# Altium PCB PCB1.PcbDoc
Units mil, origin at the board's own origin, x right, y up, seen from the top; angles counter-clockwise.
Board outline 2515 x 2455 mil, 2 copper layers (Top Layer, Bottom Layer); 61 components, 46 nets, 222 pads, 26 vias.
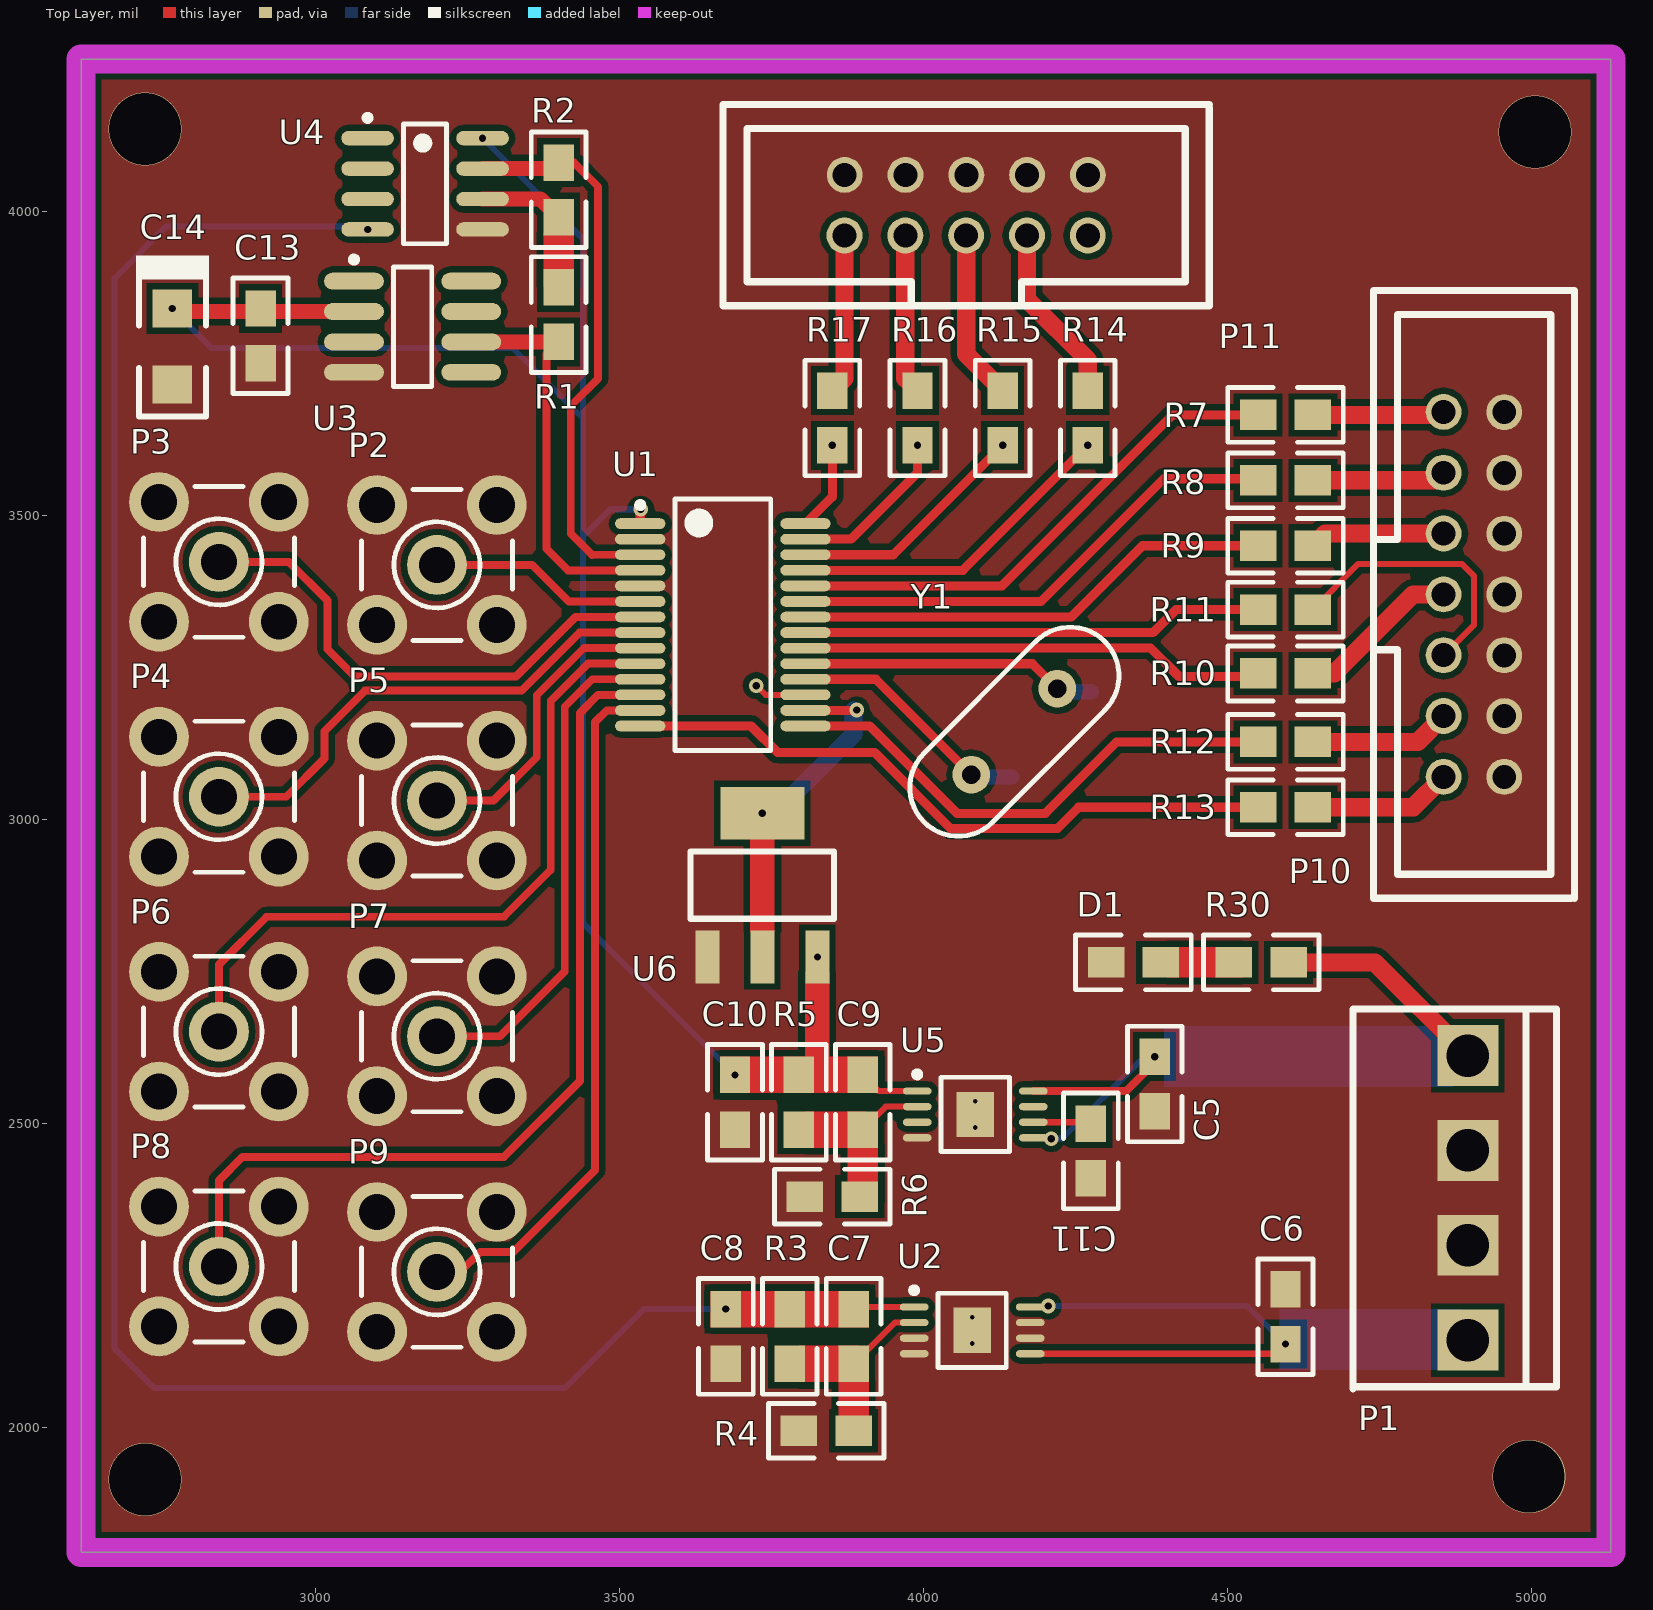
[diagram p0: Top Layer view]
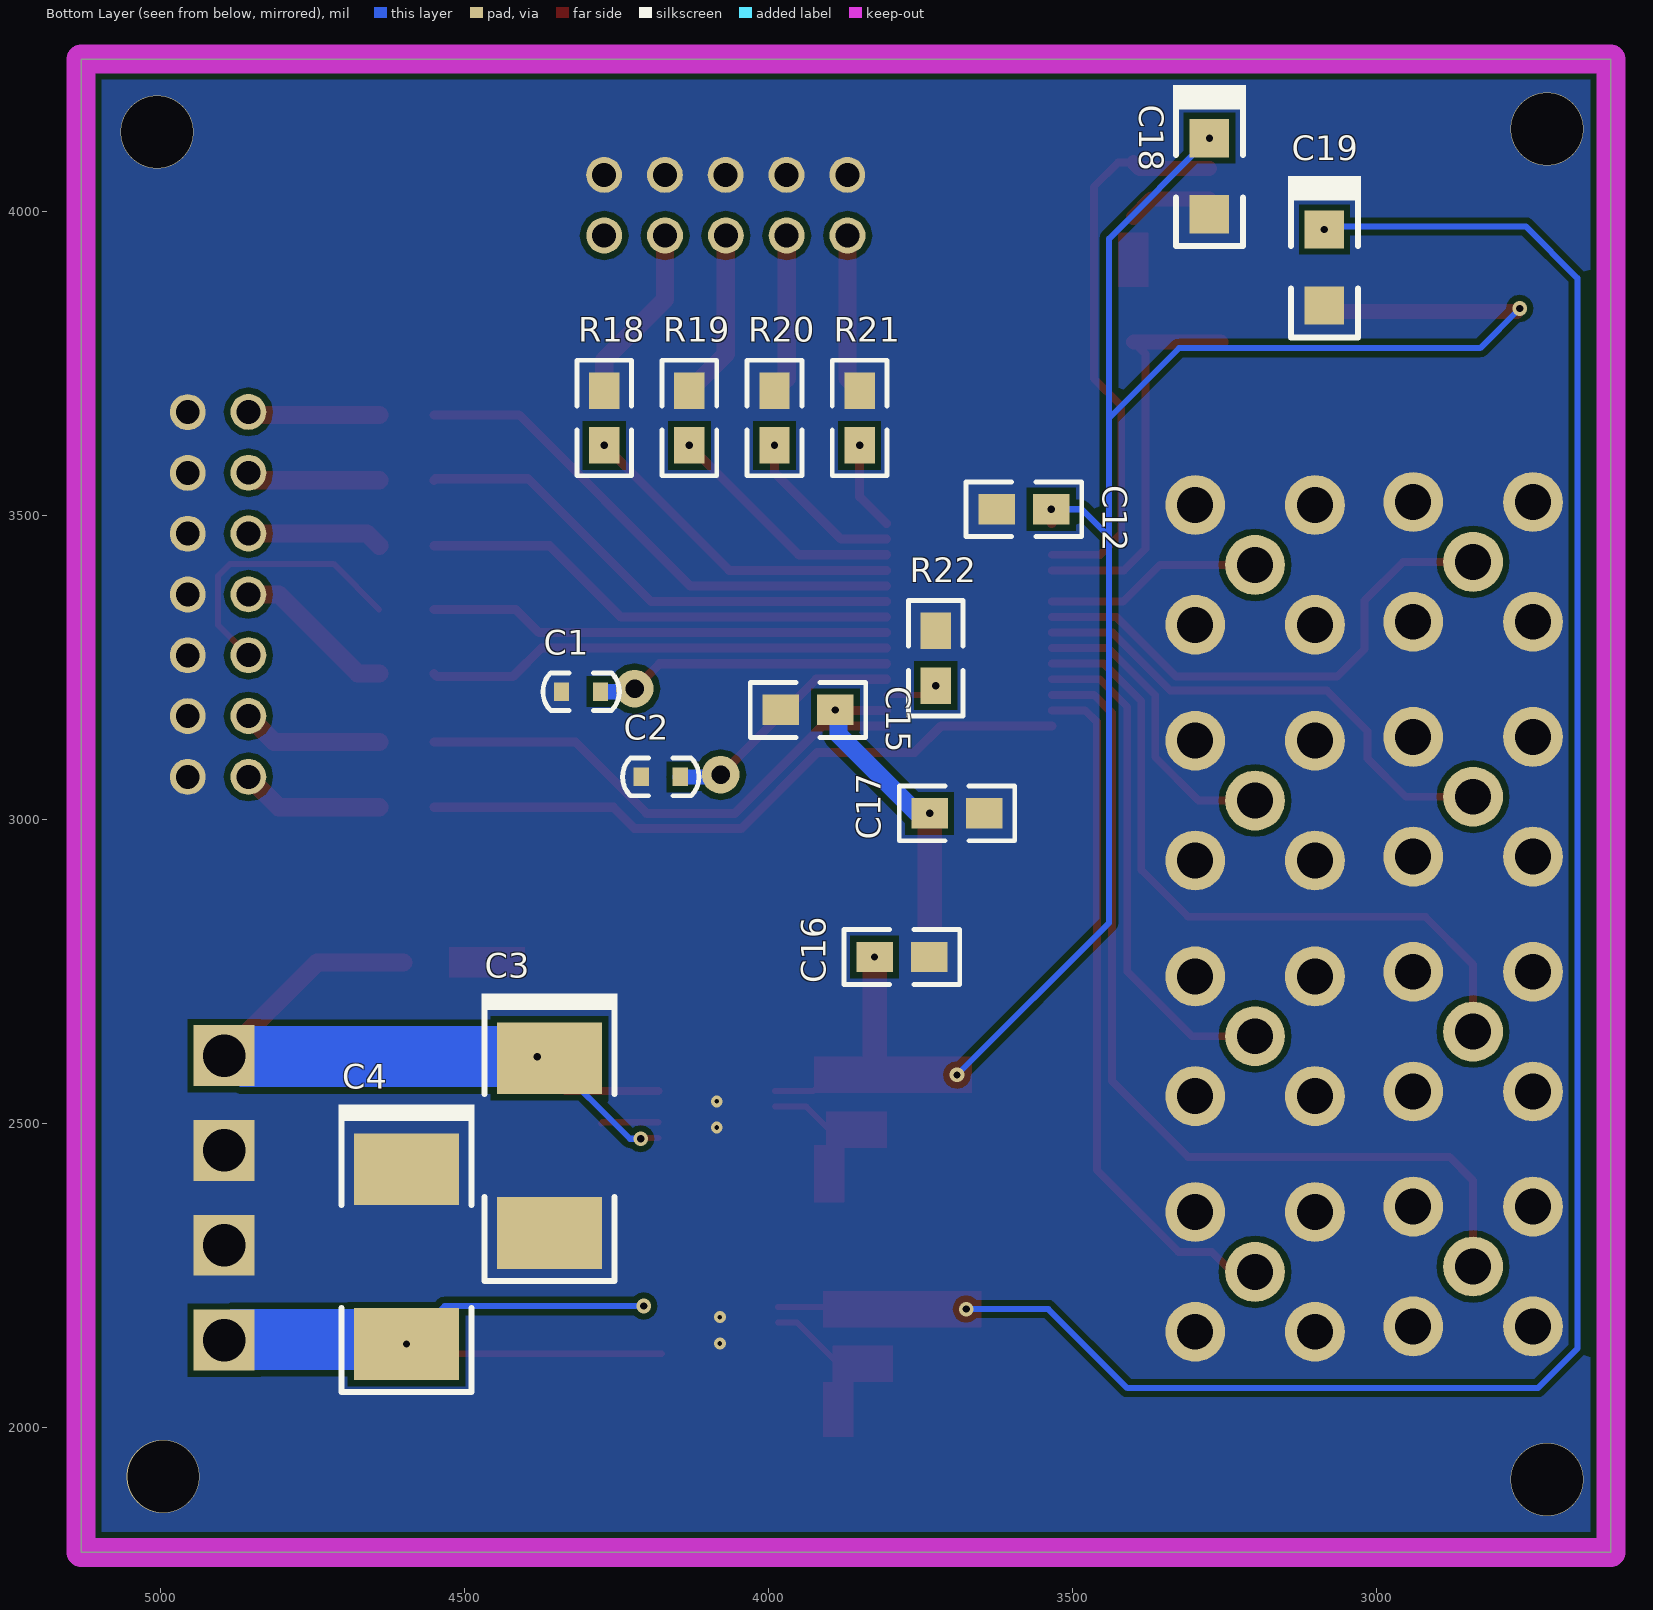
[diagram p1: Bottom Layer view, seen from below]

## Layer stack, top to bottom
Top Solder: solder mask 0.4, Solder Resist, Dk 3.5
Top Layer: signal copper 1.4
Dielectric 1: dielectric 12.6, FR-4, Dk 4.8
Bottom Layer: signal copper 1.4
Bottom Solder: solder mask 0.4, Solder Resist, Dk 3.5

## Board outline
2615,1795 5130,1795 5130,4250 2615,4250

## Design rules (kind name [scope] priority, off if disabled: settings)
Clearance [All] p1: gap=10
PlaneConnect [All] p1: planeconnectstyle=Direct reliefexpansion=20 reliefentries=4 reliefconductorwidth=10 reliefairgap=10
PolygonConnect [All] p1: connectstyle=Direct reliefconductorwidth=10 reliefentries=4 polygonreliefangle="90 Angle" airgapwidth=10
RoutingVias [All] p1: holewidth=28 width=50 viastyle="Through Hole" minholewidth=28 minwidth=50 maxholewidth=28 maxwidth=50
SolderMaskExpansion [All] p1: expansion=4
Width [All] p1: maxlimit=100 minlimit=10 preferedwidth=10
29 further rules are at their usual default settings.

## Components (designator, comment, footprint, x,y, rotation, side; value= is the part's Value field where it differs from the comment)
C1 "18P" 0603C 4340,3210 r180 bottom
C2 "18P" 0603C 4209,3070 r180 bottom
C3 "Cap" 7343C-TYPE_D 4360,2607.4 r90 bottom
C4 "Cap" 7343C-TYPE_D 4595,2425 r90 bottom
C5 "0.1uf" 0805 4380,2610 r270 top
C6 "0.1uf" 0805 4595,2137.6 r90 top
C7 "10nf" 0805 3885,2105 r90 top
C8 "10uf" 0805 3675,2105 r90 top
C9 "10nf" 0805 3900,2490 r90 top
C10 "10uf" 0805 3690,2490 r90 top
C11 "10nf" 0805 4275,2410 r90 top
C12 "0.1uf" 0805 3625,3510 r180 bottom
C13 "0.1uf" 0805 2910,3750 r90 top
C14 "Cap" 3216C-TYPE_A 2765,3840 r90 top
C15 "0.1uf" 0805 3980,3180 r180 bottom
C16 "0.1uf" 0805 3735.55,2773.78 r0 bottom
C17 "0.1uf" 0805 3645,3010 r0 bottom
C18 "0.1uf" 3216C-TYPE_A 3275,4120 r90 bottom
C19 "0.1uf" 3216C-TYPE_A 3086.02,3970 r90 bottom
D1 "LED" 0805 4390,2765 r180 top
P1 "VH3.96-4A" VH3.96-4P 5040.67,2688.58 r270 top
P2 "SMB" SMB_V-RJ45 3200,3418.43 r90 top
P3 "SMB" SMB_V-RJ45 2841.57,3423.43 r90 top
P4 "SMB" SMB_V-RJ45 2841.57,3037.28 r90 top
P5 "SMB" SMB_V-RJ45 3200,3031.01 r90 top
P6 "SMB" SMB_V-RJ45 2841.57,2651.14 r90 top
P7 "SMB" SMB_V-RJ45 3200,2643.6 r90 top
P8 "SMB" SMB_V-RJ45 2841.57,2265 r90 top
P9 "SMB" SMB_V-RJ45 3200,2256.18 r90 top
P10 "DC3-20P" DC3-14P 4739.65,3869.61 r270 top
P11 "DC3-10P" DC3-10P 3670.39,3844.65 r0 top
R1 "100K" 0805 3400,3875 r270 top
R2 "100K" 0805 3400,4080 r270 top
R3 "0" 0805 3780,2105 r90 top
R4 "0" 0805 3795,1995 r0 top
R5 "0" 0805 3795,2490 r90 top
R6 "0" 0805 3805,2380 r0 top
R7 "100R" 0805 4640,3665 r180 top
R8 "100R" 0805 4640,3557.5 r180 top
R9 "100R" 0805 4640,3450 r180 top
R10 "100R" 0805 4640,3240 r180 top
R11 "100R" 0805 4640,3345 r180 top
R12 "100R" 0805 4640,3127.5 r180 top
R13 "100R" 0805 4640,3020 r180 top
R14 "100R" 0805 4270,3705 r270 top
R15 "100R" 0805 4130,3705 r270 top
R16 "100R" 0805 3990,3705 r270 top
R17 "100R" 0805 3850,3705 r270 top
R18 "100R" 0805 4270,3705 r270 bottom
R19 "100R" 0805 4130,3705 r270 bottom
R20 "100R" 0805 3990,3705 r270 bottom
R21 "100R" 0805 3850,3705 r270 bottom
R22 "0" 0805 3725,3220 r90 bottom
R30 "10K" 0805 4600,2765 r180 top
U1 "ADS1256IDBRG4" TI-DB28_N 3670,3320 r0 top
U2 "TPS7A3401DGNR" TI-DGN8-1760X1425TP_N 4080,2160 r0 top
U3 "REF43" TI-D8_M 3160,3810 r0 top
U4 "OPA2333AIDRG4" TI-D8_N 3180.51,4045 r0 top
U5 "TPS7A4901DGNR" TI-DGN8-1760X1425TP_N 4085,2515 r0 top
U6 "AMS1117-3.3V" SOT-223 3735,2891.89 r270 top
Y1 "XTAL" HC-49S 4220,3215 r225 top

## Footprints (in the part's own frame and the unit in brackets; to place one, negate y for a bottom-side part, rotate by r counter-clockwise, add the part's x,y. Pads: shape width x height; smd on the part's side, far side on the other; paste and mask are expansions set on the pad)
0603C [mil]
  rect 25x30 smd: 1(0,0) 2(64,0)
  silkscreen extent -31,-31 95,31
0805 [mil]
  rect 60x50 smd: 1(0,0) 2(90,0)
  silkscreen extent -50,-45 140,45
3216C-TYPE_A [mm]
  rect 1.6x1.65 smd: 1(0,0) 2(-3.175,0)
  silkscreen extent -4.51,-1.54 2.22,1.52
7343C-TYPE_D [mm]
  rect 3x4.4 smd: 1(0,0) 2(-7.3,0)
  silkscreen extent -9.31,-2.84 2.7,2.84
DC3-10P [mm]
  round 1.5 hole 1: 1(5.07,2.93) 2(5.08,5.461) 3(7.61,2.93) 4(7.618,5.461) 5(10.15,2.93) 6(10.157,5.461) 7(12.69,2.93) 8(12.695,5.461) 9(15.23,2.93) 10(15.233,5.461)
  silkscreen extent 0,0 20.3,8.4
DC3-14P [mm]
  round 1.5 hole 1: 1(5.07,2.93) 2(5.08,5.461) 3(7.61,2.93) 4(7.618,5.461) 5(10.15,2.93) 6(10.157,5.461) 7(12.69,2.93) 8(12.695,5.461) 9(15.23,2.93) 10(15.233,5.461) 11(17.77,2.93) 12(17.772,5.461) 13(20.31,2.93) 14(20.31,5.461)
  silkscreen extent 0,0 25.38,8.4
HC-49S [mil]
  round 62 hole 30: 1(0,0) 2(200,0)
  silkscreen extent -110,-80 310,80
SMB_V-RJ45 [mm] "Connector; SMB Straight"
  round 2.5 hole 1.5: 1(0,0) 2(-2.5,-2.5) 2(-2.5,2.5) 2(2.5,-2.5) 2(2.5,2.5)
  silkscreen extent -3.15,-3.15 3.15,3.15
SOT-223 [mm]
  rect 2.2x1 smd: 1(3,-2.3) 2(3,0) 3(3,2.3)
  rect 2.2x3.5 smd: 2(-3,0)
  silkscreen extent -1.4,-3 1.4,3, body extent -3.49,-3.24 3.49,3.24, height 1.64
TI-D8_M [mm] "SOIC, 8-Leads, Body 4.9x3.9mm, Pitch 1.27mm, IPC Low Density"
  oval 2.5x0.7 smd: 1(-2.45,1.905) 2(-2.45,0.635) 3(-2.45,-0.635) 4(-2.45,-1.905) 5(2.45,-1.905) 6(2.45,-0.635) 7(2.45,0.635) 8(2.45,1.905)
  silkscreen extent -2.57,-2.5 0.8,2.93, body extent -2,-2.5 2,2.5, height 1.75
TI-D8_N [mm] "SOIC, 8-Leads, Body 4.9x3.9mm, Pitch 1.27mm, IPC Medium Density"
  oval 2.2x0.6 smd: 1(-2.4,1.905) 2(-2.4,0.635) 3(-2.4,-0.635) 4(-2.4,-1.905) 5(2.4,-1.905) 6(2.4,-0.635) 7(2.4,0.635) 8(2.4,1.905)
  silkscreen extent -2.52,-2.5 0.9,2.88, body extent -2,-2.5 2,2.5, height 1.75
TI-DB28_N [mm] "SOP, 28-Leads, Body 10.2x5.3mm, Pitch 0.65mm, IPC Medium Density"
  oval 2.1x0.45 smd: 1(-3.45,4.225) 2(-3.45,3.575) 3(-3.45,2.925) 4(-3.45,2.275) 5(-3.45,1.625) 6(-3.45,0.975) 7(-3.45,0.325) 8(-3.45,-0.325) 9(-3.45,-0.975) 10(-3.45,-1.625) 11(-3.45,-2.275) 12(-3.45,-2.925) 13(-3.45,-3.575) 14(-3.45,-4.225) 15(3.45,-4.225) 16(3.45,-3.575) 17(3.45,-2.925) 18(3.45,-2.275) 19(3.45,-1.625) 20(3.45,-0.975) 21(3.45,-0.325) 22(3.45,0.325) 23(3.45,0.975) 24(3.45,1.625) 25(3.45,2.275) 26(3.45,2.925) 27(3.45,3.575) 28(3.45,4.225)
  silkscreen extent -3.57,-5.25 2,5.25, body extent -2.8,-5.25 2.8,5.25, height 2
TI-DGN8-1760X1425TP_N [mm] "SOIC, 8-Leads, Body 3x3mm, Pitch 0.65mm, Thermal Pad 1.76x1.425mm, IPC Medium Density"
  oval 1.2x0.3 smd: 1(-2.425,0.975) 2(-2.425,0.325) 3(-2.425,-0.325) 4(-2.425,-0.975) 5(2.425,-0.975) 6(2.425,-0.325) 7(2.425,0.325) 8(2.425,0.975)
  rect 1.57x1.89 smd: 9(0,0)
  silkscreen extent -2.55,-1.55 1.43,1.8, body extent -1.55,-1.55 1.55,1.55, height 1.1
VH3.96-4P [mm]
  rect 2.54x2.54 hole 1.778: 1(1.95,-3.7) 2(5.91,-3.7) 3(9.87,-3.7) 4(13.83,-3.7)
  silkscreen extent 0,-8.5 15.87,0

## Part data
C1 C2 C5 C6 C7 C8 C9 C10 C11 C12 C13 C15 C16 C17 C18 C19: library part Cap
C3 C4 C14: library part "Tantalium Cap"
D1 R1 R2 R3 R4 R5 R6 R7 R8 R9 R10 R11 R12 R13 R14 R15 R16 R17 R18 R19 R20 R21 R22 R30: library part Res
P2 P3 P4 P5 P6 P7 P8 P9: "SMB Straight Connector"
U1: "24-Bit, 30 kSPS Very Low Noise Delta-Sigma ADC with Multiplexer, -40 to 85 degC, 28-pin SOP (DB28), Green (RoHS & no Sb/Br)"
U2: "Single Output Low Noise LDO, 200 mA, Adjustable -1.18 to -18 V Output, -3 to -20 V Input, 8-pin MSOP (DGN), -40 to 125 degC, Green (RoHS & no Sb/Br)"
U4: "17 uA, MicroPower, Precision, Zero Drift CMOS Operational Amplifier, 1.8 to 5.5 V, -40 to 125 degC, 8-pin SOIC (D8), Green (RoHS & no Sb/Br)"
U5: "Single Output High PSRR LDO, 150 mA, Adjustable 1.2 to 33 V Output, 3 to 36 V Input, with Ultra-Low Noise, 8-pin MSOP (DGN), -40 to 125 degC, Green (RoHS & no Sb/Br)"
Y1: "Crystal Oscillator"

## Via types
v1: diameter 24, hole 12, Top Layer to Bottom Layer, 18 vias
v2: diameter 19.68, hole 7.87, Top Layer to Bottom Layer, 4 vias
v3: diameter 120.08, hole 118.11, Top Layer to Bottom Layer, 4 vias

## Nets (pads, with @x,y where several pads share a name; then routed paths per layer and width w, separated by ;. In a path a pad name is that pad's centre, name@x,y a point inside that pad or via, vN(x,y) a via of type N, cw(c..) or ccw(c..) an arc to the next point about the centre after c; other vN are vias at no path point)
"+2.5V REF": R1.2 U1.4 U3.6 | length 660.7
  Top Layer w13: R1.2 3380,3765 3380,3445 3415.43,3409.57 U1.4
  Top Layer w25: U3.6 R1.2
+3.3V: C15.2 C17.2 U1.16 U6.2 | length 327.6
  Top Layer w15: U1.16 3889.25,3179.25 v1(3890,3180)
  Bottom Layer w30: v1(3735,3010) 3755,3010 3885,3140 C15.2@3885,3179.25
+5V: C9.2 C10.2 C12.2 C13.2 C14.1 C16.2 C18.1 R5.2 U1.1 U3.2 U4.8 U5.1 U6.3 | length 3007.3
  Top Layer w10: C9.2 3926.61,2553.39 U5.1
  Top Layer w15: U1.1 3534.17,3509.17 v1(3535,3510)
  Top Layer w20: v1(2765,3840) C14.1@2770,3835
  Top Layer w25: C14.1@2770,3835 U3.2
  Bottom Layer w10: v1@2760,3845 v1(2765,3840) 2830,3775 3325,3775 3440,3660 ; v1(3275,4120) 3440,3955 3440,3660 ; v1(3535,3510) 3485,3510 3440,3465 ; v1(3690,2580) 3440,2830 3440,3465 ; 3440,3465 3440,3660
  other v1: 3825.55,2773.78
"-2.5V REF": R2.1 U1.3 U4.7 | length 928.1
  Top Layer w13: R2.1 3425,4080 3465,4040 3465,3725 3420,3680 3420,3470 3455,3435 3455.16,3435.16 U1.3
  Top Layer w25: U4.7 3390,4070 R2.1
-5V: C7.2 C8.2 C19.1 R3.2 U2.1 U4.4 | length 3400
  Top Layer w10: C7.2 3888.39,2198.39 U2.1
  Bottom Layer w10: v1(3086.02,3970) 3081.02,3975 2755,3975 2670,3890 2670,2130 2735,2065 3410,2065 3540,2195 v1(3675,2195)
DGND: R22.1 U1.17 | length 87.1
  Top Layer w10: v1(3725,3220) 3740.16,3204.84 U1.17
GND: C1.1 C2.1 C3.2 C4.1 C5.2 C6.2 C8.1 C10.1 C11.1 C12.1 C13.1 C14.2 C15.1 C16.1 C17.1 C18.2 C19.2 D1.2 P1.2 P1.3 P2.2 P3.2 P4.2 P5.2 P6.2 P7.2 P8.2 P9.2 P10.2 P10.4 P10.6 P10.8 P10.10 P10.12 P10.14 P11.2 P11.4 P11.6 P11.8 P11.10 R4.1 R6.1 R18.1 R19.1 R20.1 R21.1 R22.2 U1.2 U1.5 U2.3 U2.4 U2.6 U2.7 U2.9 U3.4 U4.5 U5.4 U5.9 U6.1
  other v2: 4080,2138.35 4080,2181.65 4085,2493.35 4085,2536.65
  other v3: 2720,1915 4995,1920 5005,4130 2720,4135
NetC1_2: C1.2 U1.19 Y1.1 | length 489.2
  Top Layer w15: U1.19 4178.98,3256.02 Y1.1
  Bottom Layer w25: Y1.1 4225,3210 C1.2
NetC2_2: C2.2 U1.18 Y1.2 | length 405.6
  Top Layer w15: U1.18 3921.72,3230.43 Y1.2
  Bottom Layer w25: Y1.2 4082.16,3070 C2.2
NetC7_1: C7.1 R3.1 R4.2 U2.2 | length 127.6
  Top Layer w10: C7.1 3952.8,2172.8 U2.2
NetC9_1: C9.1 R5.1 R6.2 U5.2 | length 105.2
  Top Layer w10: C9.1 3937.8,2527.8 U5.2
NetC11_2: C11.2 U5.6 | length 95.4
  Top Layer w10: U5.6 4272.8,2502.2 C11.2
NetD1_1: D1.1 R30.2
NetP2_1: P2.1 U1.6 | length 359.2
  Top Layer w13: P2.1 3356.57,3418.43 3416.85,3358.15 3533.94,3358.15 U1.6
NetP3_1: P3.1 U1.7 | length 858
  Top Layer w13: P3.1 2956.57,3423.43 3020,3360 3020,3280 3065,3235 3329.89,3235 3427.69,3332.8 U1.7
NetP4_1: P4.1 U1.8 | length 830.8
  Top Layer w13: P4.1 2952.28,3037.28 3015,3100 3015,3145 3082,3212 3339.42,3212 3434.62,3307.2 U1.8
NetP5_1: P5.1 U1.9 | length 497.7
  Top Layer w13: P5.1 3292.93,3031.01 3364.14,3102.22 3364.14,3204.19 3441.56,3281.61 U1.9
NetP6_1: P6.1 U1.10 | length 1170.6
  Top Layer w13: P6.1 2841.57,2761.57 2920,2840 3310,2840 3387.14,2917.14 3387.14,3194.66 3448.73,3256.26 3533.94,3256.26 U1.10
NetP7_1: P7.1 U1.11 | length 832.1
  Top Layer w13: P7.1 3303.6,2643.6 3410.14,2750.14 3410.14,3185.14 3455.43,3230.43 U1.11
NetP8_1: P8.1 U1.12 | length 1519.2
  Top Layer w13: P8.1 2841.57,2406.57 2880,2445 3310,2445 3435,2570 3435,3175 3464.84,3204.84 U1.12
NetP9_1: P9.1 U1.13 | length 1148.1
  Top Layer w13: P9.1 3238.49,2256.18 3271.21,2288.89 3325.64,2288.89 3460,2423.25 3460,3160 3479.25,3179.25 U1.13
NetP10_1: P10.1 R7.1 | length 217.1
  Top Layer w30: R7.1 4850,3665 P10.1
NetP10_3: P10.3 R8.1 | length 220.2
  Top Layer w30: R8.1 4842.5,3557.5 P10.3
NetP10_5: P10.5 R9.1 | length 223.3
  Top Layer w30: R9.1 4660,3470 P10.5
NetP10_7: P10.7 R10.1 | length 268.8
  Top Layer w30: R10.1 4675,3240 4805,3370 P10.7
NetP10_9: P10.9 R11.1 | length 455.1
  Top Layer w10: R11.1 4715,3420 4885,3420 4905,3400 4905,3320 P10.9
NetP10_11: P10.11 R12.1 | length 232.6
  Top Layer w30: R12.1 4812.5,3127.5 P10.11
NetP10_13: P10.13 R13.1 | length 235.7
  Top Layer w30: R13.1 4805,3020 P10.13
NetP11_1: P11.1 R17.1 | length 263.3
  Top Layer w30: R17.1 3870,3725 P11.1
NetP11_3: P11.3 R16.1 | length 263.3
  Top Layer w30: P11.3 3970,3725 R16.1
NetP11_5: P11.5 R15.1 | length 279.9
  Top Layer w30: P11.5 4070,3765 R15.1
NetP11_7: P11.7 R14.1 | length 296.4
  Top Layer w30: P11.7 4170,3855 4270,3755 R14.1
NetR1_1: R1.1 R2.2 U4.6 | length 137.4
  Top Layer w25: U4.6 3370,4020 R2.2
NetR7_2: R7.2 U1.24 | length 860.6
  Top Layer w15: U1.24 4128.98,3383.98 4410,3665 R7.2
NetR8_2: R8.2 U1.23 | length 828.7
  Top Layer w15: U1.23 4193.39,3358.39 4395,3560 4547.5,3560 R8.2
NetR9_2: R9.2 U1.22 | length 792.7
  Top Layer w15: U1.22 4242.8,3332.8 4360,3450 R9.2
NetR10_2: R10.2 U1.20 | length 765.6
  Top Layer w15: U1.20 4373.39,3281.61 4420,3235 4545,3235 R10.2
NetR11_2: R11.2 U1.21 | length 759.8
  Top Layer w15: U1.21 4377.2,3307.2 4415,3345 R11.2
NetR12_2: R12.2 U1.15 | length 852.3
  Top Layer w15: U1.15 3911.34,3153.66 4055,3010 4200,3010 4317.5,3127.5 R12.2
NetR13_2: R13.2 U1.14 | length 1100.2
  Top Layer w15: U1.14 3716.34,3153.66 3760,3110 3919.64,3110 4044.64,2985 4220,2985 4255,3020 R13.2
NetR14_2: R14.2 R18.2 U1.25 | length 549.3
  Top Layer w15: U1.25 4064.57,3409.57 v1(4270,3615)
NetR15_2: R15.2 R19.2 U1.26 | length 398.7
  Top Layer w15: U1.26 3950.16,3435.16 v1(4130,3615)
NetR16_2: R16.2 R20.2 U1.27 | length 274.4
  Top Layer w15: U1.27 3880.75,3460.75 3990,3570 v1(3990,3615)
NetR17_2: R17.2 R21.2 U1.28 | length 147
  Top Layer w15: U1.28 3850,3530.51 v1(3850,3615)
VCC: C3.1 C5.1 P1.1 R30.1 U5.5 U5.8 | length 822.3
  Top Layer w10: U5.5 4208.39,2476.61 v1(4210,2475)
  Top Layer w13: U5.8 4333.39,2553.39 4380,2600 v1(4380,2610)
  Top Layer w30: R30.1 4741.81,2765 P1.1
  Bottom Layer w10: v1(4210,2475) 4227.6,2475 C3.1
VDD: C4.2 C6.1 P1.4 U2.5 U2.8 | length 842
  Top Layer w10: U2.5 4579.02,2121.61 v1(4595,2137.6)
  Bottom Layer w10: v1(4205,2200) 4532.6,2200 v1(4595,2137.6)
pads on no net: P11.9 U3.1 U3.3 U3.5 U3.7 U3.8 U4.1 U4.2 U4.3 U5.3 U5.7

## Polygon pours and split planes (outlines as drawn)
GND on Top Layer "Top Layer-No Net" (solid, pour order 4): 2615,1795 5130,1795 5130,4250 2615,4250
GND on Bottom Layer "Top Layer-No Net" (solid, pour order 6): 2615,1795 5130,1795 5130,4250 2615,4250

## Keep-outs
Keep-Out Layer:
  the board outline again, w47.24

## Other copper
Top Layer:
  rectangle net NetD1_1: 4400,2740 4525,2790
  rectangle net +5V: 3805,2595 3845,2750
  rectangle net NetC9_1: 3805,2460 3905,2520
  rectangle net NetC9_1: 3875,2370 3925,2465
  rectangle net NetC7_1: 3795,2075 3895,2135
  rectangle net NetC7_1: 3860,1985 3910,2075
  rectangle net +5V: 3665,2550 3925,2610
  rectangle net -5V: 3650,2165 3910,2225
  rectangle net +3.3V: 3715,2815 3755,2985
  rectangle net NetR1_1: 3375,3875 3425,3965
Bottom Layer:
  rectangle net VDD: 4585,2095 4885,2195
  rectangle net VCC: 4395,2560 4870,2660